# Altium PCB Mag_Encoder_TLE5501.PcbDoc
Units mil, origin at the board's own origin, x right, y up, seen from the top; angles counter-clockwise.
Board outline 1496.06 x 1105.24 mil, 2 copper layers (Top Layer, Bottom Layer); 5 components, 5 nets, 20 pads, 0 vias.
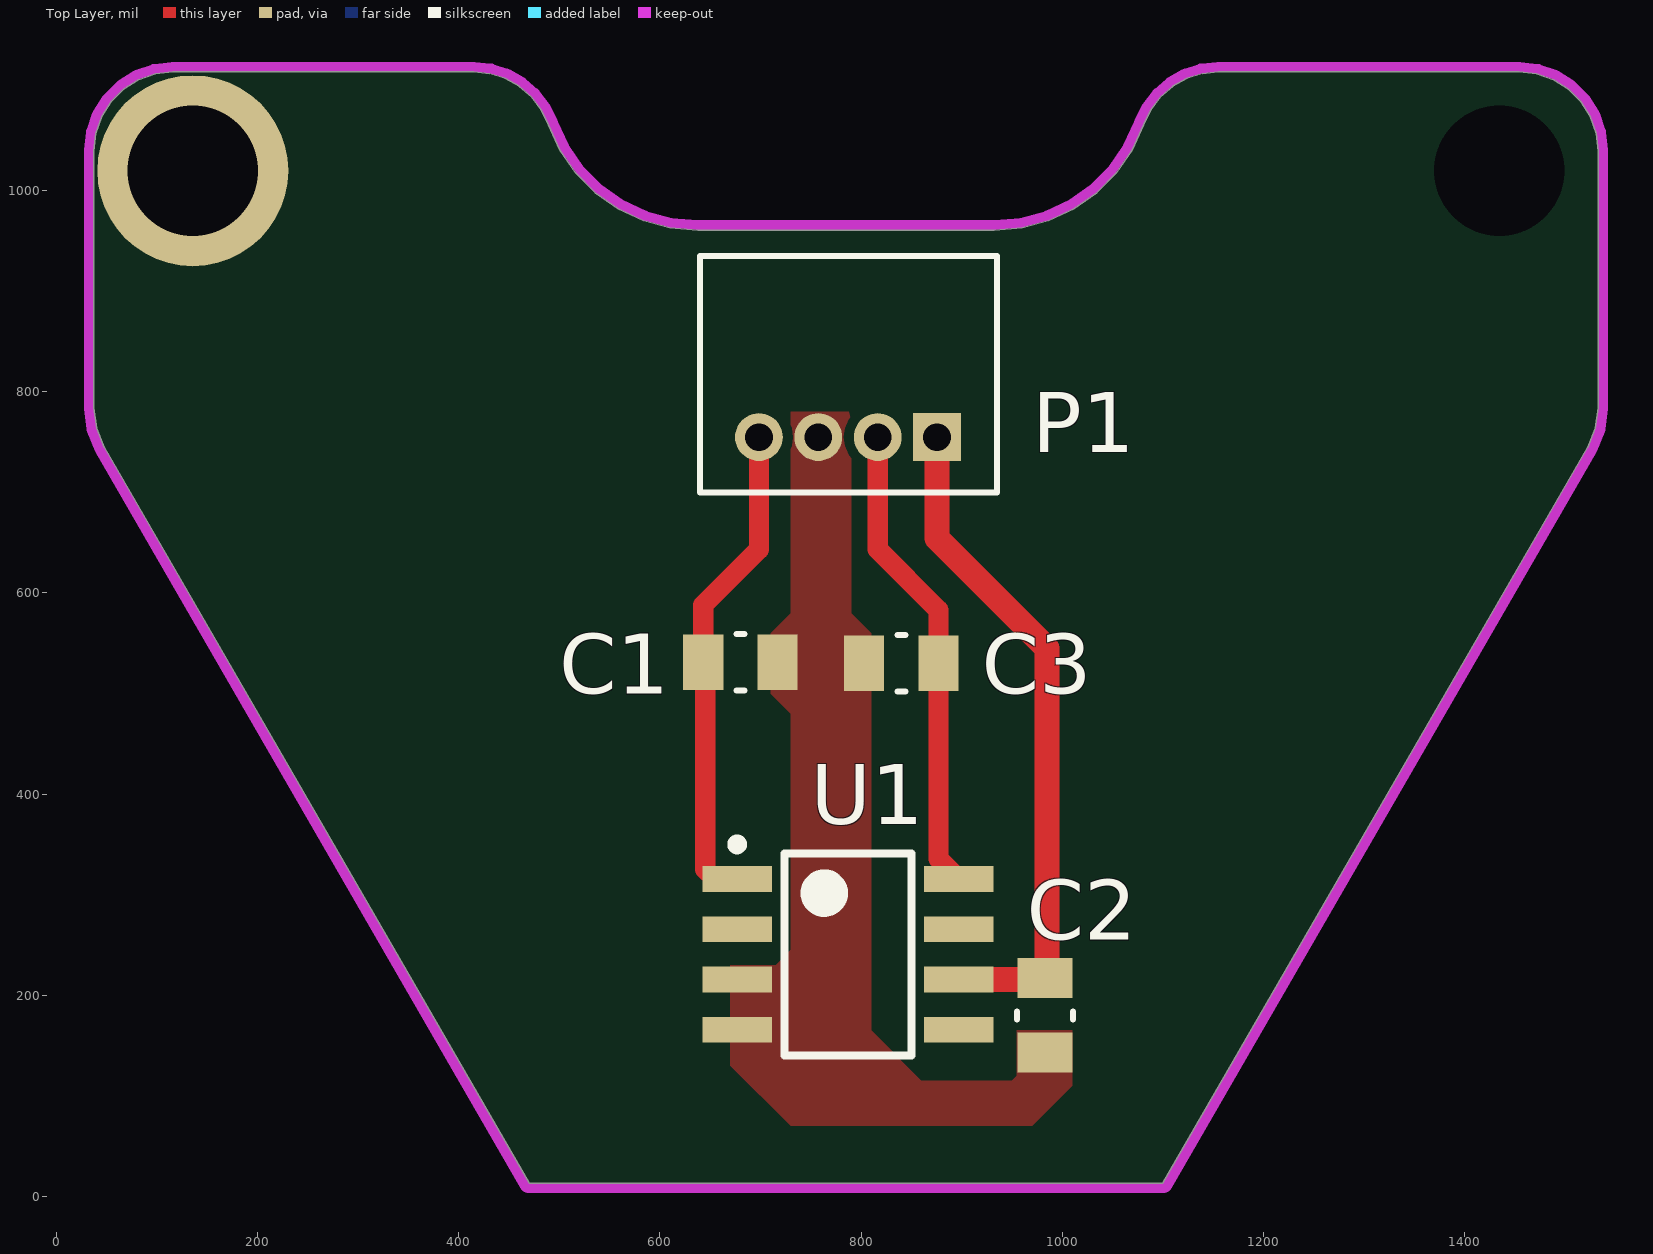
[diagram p0: Top Layer view]
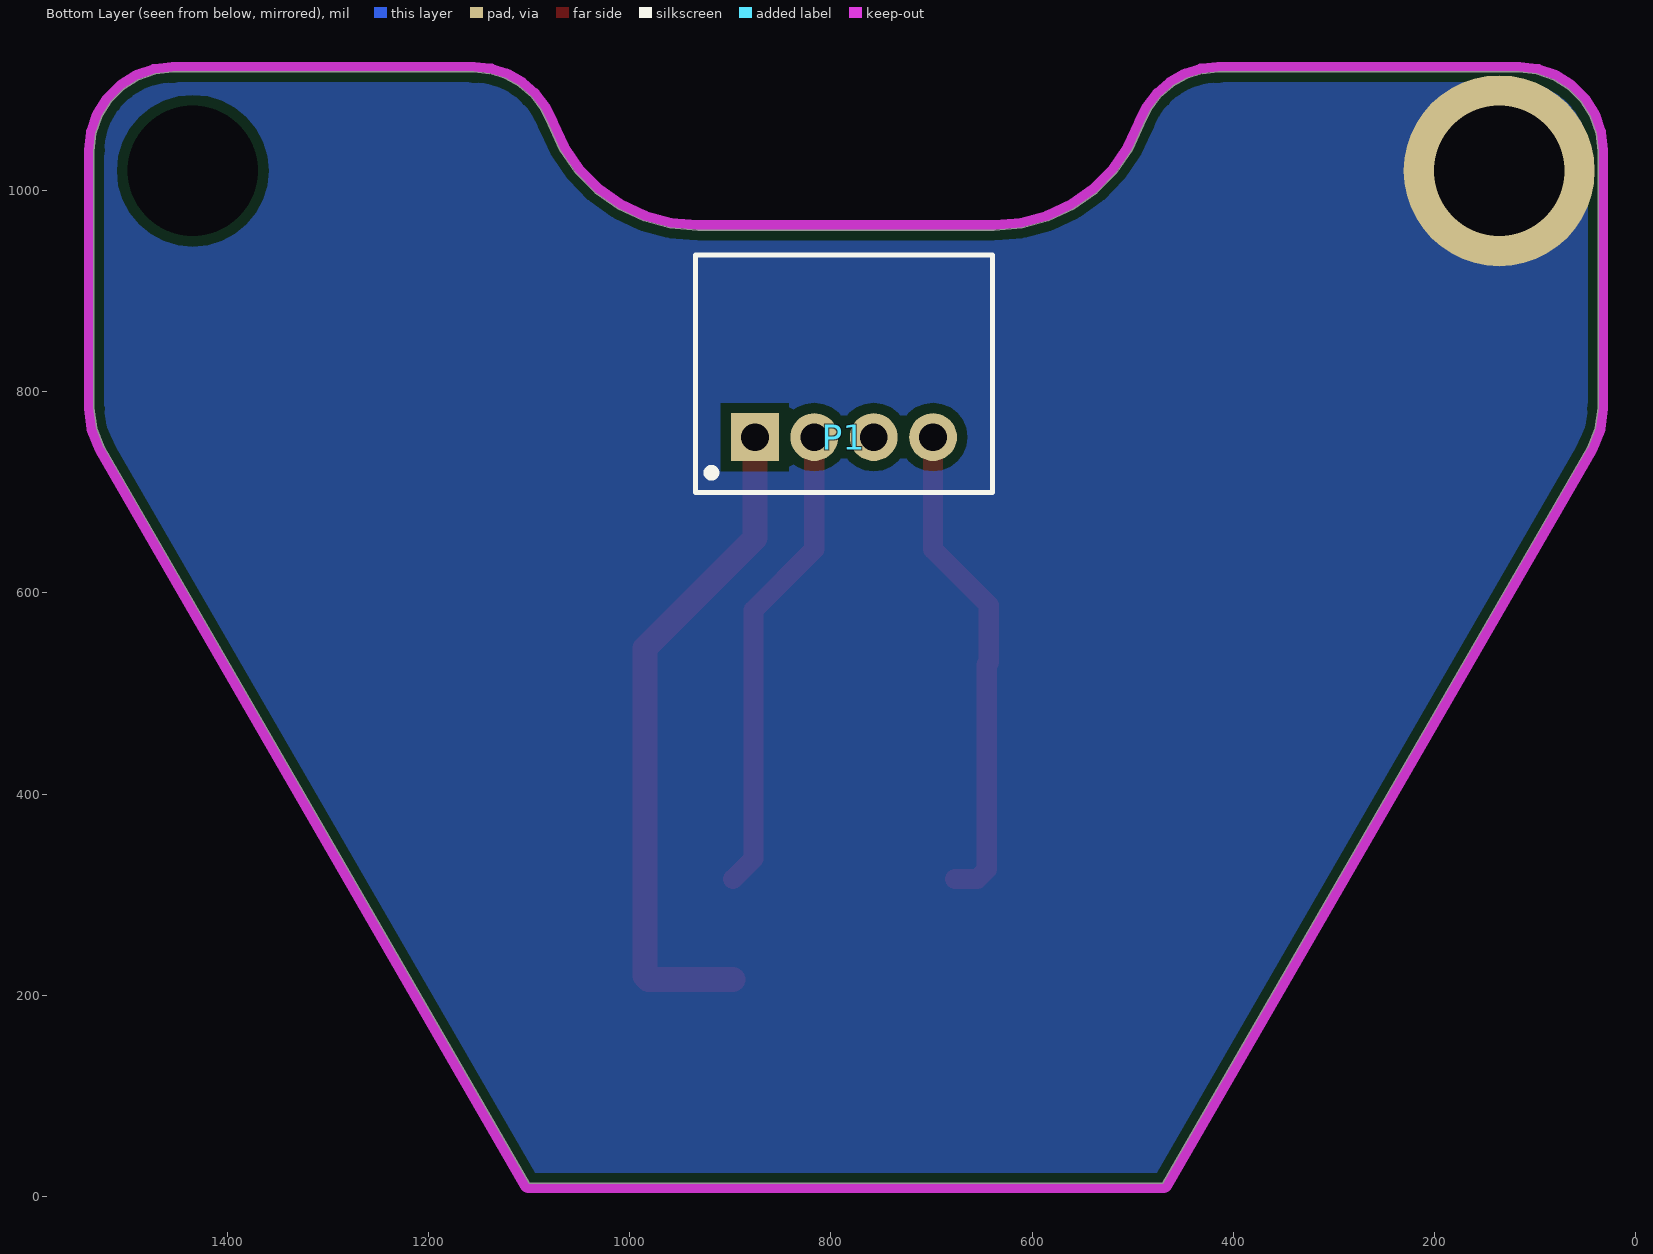
[diagram p1: Bottom Layer view, seen from below]

## Layer stack, top to bottom
Top Solder: solder mask 0.4, Solder Resist, Dk 3.5
Top Layer: signal copper 1.4
Dielectric 1: dielectric 12.6, FR-4, Dk 4.8
Bottom Layer: signal copper 1.4
Bottom Solder: solder mask 0.4, Solder Resist, Dk 3.5

## Board outline
1099.96,13.03 1522.48,744.86 1530.35,763.85 1533.03,784.23 1533.03,1039.54 1531.06,1057.06 1525.23,1073.7 1515.85,1088.63 1503.38,1101.1 1488.46,1110.48 1471.81,1116.3 1454.29,1118.28 1155.35,1118.28 1139.31,1116.62 1123.94,1111.74 1109.89,1103.83 1097.74,1093.22 1088.02,1080.36 1081.11,1065.78 1069.64,1040.62 1053.94,1017.85 1034.5,998.17 1011.92,982.21 986.89,970.43 960.19,963.22 932.64,960.8 637.36,960.8 609.81,963.22 583.11,970.43 558.08,982.21 535.5,998.17 516.06,1017.85 500.36,1040.62 488.89,1065.78 481.98,1080.36 472.26,1093.22 460.11,1103.83 446.06,1111.74 430.69,1116.62 414.65,1118.28 115.71,1118.28 98.19,1116.3 81.54,1110.48 66.61,1101.1 54.15,1088.63 44.77,1073.7 38.94,1057.06 36.97,1039.54 36.97,784.23 39.65,763.85 47.52,744.86 470.04,13.03

## Design rules (kind name [scope] priority, off if disabled: settings)
BoardOutlineClearance [All] p1: gap=0 except(10: Track-OutlineEdge)
Clearance [All] p1: gap=10
PolygonConnect [All] p1: connectstyle=Direct reliefconductorwidth=10 reliefentries=4 polygonreliefangle="90 Angle" airgapwidth=10
RoomDefinition Mag_Encoder_TLE5501 [InComponentClass('Mag_Encoder_TLE5501')] p1: confinementstyle=ConfineIn formatcopy=TRUE lockcomponents=FALSE outline -70,-115 1665,-115 1665,1180 -70,1180
RoutingVias [All] p1: holewidth=28 width=50 viastyle="Through Hole" minholewidth=28 minwidth=50 maxholewidth=28 maxwidth=50
SolderMaskExpansion [All] p1: expansion=4
Width [All] p1: maxlimit=50 minlimit=10 preferedwidth=10 minimp=50.000000 maximp=50.000000 favimp=50.000000
30 further rules are at their usual default settings.

## Components (designator, comment, footprint, x,y, rotation, side; value= is the part's Value field where it differs from the comment)
C1 "1000pF" 0805 680,531 r180 top
C2 "100nF" 0805 982.92,180 r90 top
C3 "1000pF" 0805 840,530 r0 top
P1 "S4B-ZR_(LF)(SN)" *JST_S4B-ZR(LF)(SN) 787,755 r180 bottom
U1 "TLE5501" "8-SOIC TLE5XXX ENC" 787,240.5 r0 top

## Footprints (in the part's own frame and the unit in brackets; to place one, negate y for a bottom-side part, rotate by r counter-clockwise, add the part's x,y. Pads: shape width x height; smd on the part's side, far side on the other; paste and mask are expansions set on the pad)
"8-SOIC TLE5XXX ENC" [mm]
  rect 1.75x0.65 smd: 1(-2.8,1.905) 2(-2.8,0.635) 3(-2.8,-0.635) 4(-2.8,-1.905) 5(2.8,-1.905) 6(2.8,-0.635) 7(2.8,0.635) 8(2.8,1.905)
  silkscreen extent -2.92,-2.55 1.6,2.9, body extent -2,-2.55 2,2.55, height 1.7
0805 [mil]
  rect 40x55 smd: 1(-37,0) 2(37,0)
  silkscreen extent -4,-28 4,28
*JST_S4B-ZR(LF)(SN) [mm]
  rect 1.208x1.208 hole 0.7: 1(-2.25,0)
  round 1.208 hole 0.7: 2(-0.75,0) 3(0.75,0) 4(2.25,0)
  silkscreen extent -3.75,-1.4 3.75,4.6, body extent -3.75,-1.43 3.75,4.57, height 3.7

## Part data
C1 C3: library part "CAP 1000pF 0805", "CAP CER 1000PF 50V X7R 0805"
C2: library part "CAP 100nF 0805", "CAP CER 0.1UF 50V X7R 0805"
P1: "Conn Shrouded Header HDR 4 POS 1.5mm Solder RA Thru-Hole Box"
U1: "TMR 360deg Magnetic Encoder"

## Free pads (board coordinates)
  round 190 hole 130: 1(135.39,1019.85)
  round 0 hole 130: 2(1434.61,1019.85)

## Nets (pads, with @x,y where several pads share a name; then routed paths per layer and width w, separated by ;. In a path a pad name is that pad's centre, name@x,y a point inside that pad or via, vN(x,y) a via of type N, cw(c..) or ccw(c..) an arc to the next point about the centre after c; other vN are vias at no path point)
GND: pad.1
SGND: C1.1 C2.1 C3.1 P1.3 U1.3 U1.4
VCC: C2.2 P1.1 U1.6 | length 670.5
  Top Layer w25: P1.1 875.58,654.42 985,545 985,219.08 C2.2 981.42,215.5 U1.6
VOUT_1: C3.2 P1.2 U1.8 | length 472.9
  Top Layer w20: P1.2 816.53,643.47 877,583 C3.2 877,335.74 U1.8
VOUT_2: C1.2 P1.4 U1.1 | length 489.5
  Top Layer w20: U1.1 654.5,315.5 645,325 645,529 C1.2 643,588 698.42,643.42 P1.4
pads on no net: U1.2 U1.5 U1.7

## Polygon pours and split planes (outlines as drawn)
SGND on Top Layer "SGND_L01_P000" (solid, pour order 0): 730,780 785,780 790,780 790,580 810,560 810,165 860,115 950,115 955,120 955,165 1010,165 1010,110 970,70 730,70 670,130 670,230 715,230 730,245 730,480 710,500 710,560 730,580
GND on Bottom Layer "GND_L02_P004" (solid, remove dead copper, pour order 4): 10,1125 15,1120 1580,1120 1580,10 1570,10 1565,5 45,5 0,55 0,60 0,1115 5,1120 15,1120

## Keep-outs
Keep-Out Layer:
  lines w10: 31.97,784.23 ccw(c36.97,784.23) 32.01,783.56 ; 31.97,784.23 ccw(c36.97,784.23) 32.01,783.58 32.01,783.56 ; 31.97,784.23 31.97,1039.54 ; 31.97,1039.54 cw(c36.97,1039.54) 32,1040.1 ; 31.97,1039.54 cw(c36.97,1039.54) 32,1040.1 ; 32.01,783.56 34.69,763.21 ; 32,1040.1 33.97,1057.62 ; 33.97,1057.62 cw(c38.94,1057.06) 34.22,1058.71 ; 33.97,1057.62 cw(c38.94,1057.06) 34.22,1058.71 ; 34.22,1058.71 40.05,1075.35 ; 34.69,763.2 ccw(c39.65,763.85) 35.04,761.92 ; 34.69,763.21 ccw(c39.65,763.85) 35.03,761.94 35.04,761.92 ; 34.69,763.21 34.69,763.2 ; 35.04,761.92 42.89,742.96 ; 40.05,1075.35 cw(c44.77,1073.7) 40.53,1076.36 ; 40.05,1075.35 cw(c44.77,1073.7) 40.53,1076.36 ; 40.53,1076.36 49.91,1091.29 ; 42.9,742.95 ccw(c47.52,744.86) 43.19,742.36 ; 42.89,742.96 ccw(c47.52,744.86) 43.19,742.36 ; 42.89,742.96 42.9,742.95 ; 43.19,742.36 465.71,10.53 ; 49.91,1091.29 cw(c54.15,1088.63) 50.61,1092.17 50.63,1092.18 ; 49.91,1091.29 cw(c54.15,1088.63) 50.63,1092.18 ; 50.63,1092.18 63.06,1104.62 ; 63.06,1104.62 cw(c66.61,1101.1) 63.95,1105.33 ; 63.06,1104.62 63.08,1104.63 cw(c66.61,1101.1) 63.95,1105.33 ; 63.95,1105.33 78.88,1114.71 ; 78.88,1114.71 cw(c81.54,1110.48) 79.89,1115.2 ; 78.88,1114.71 cw(c81.54,1110.48) 79.89,1115.2 ; 79.89,1115.2 96.54,1121.02 ; 96.54,1121.02 cw(c98.19,1116.3) 97.63,1121.27 ; 96.54,1121.02 cw(c98.19,1116.3) 97.63,1121.27 ; 97.63,1121.27 115.15,1123.24 ; 115.15,1123.24 cw(c115.71,1118.28) 115.71,1123.28 ; 115.15,1123.24 cw(c115.71,1118.28) 115.71,1123.28 ; 115.71,1123.28 414.65,1123.28 ; 414.65,1123.28 cw(c414.65,1118.28) 415.16,1123.25 ; 414.65,1123.28 cw(c414.65,1118.28) 415.17,1123.25 ; 415.16,1123.25 415.17,1123.25 ; 415.17,1123.25 431.19,1121.6 ; 431.19,1121.6 cw(c430.69,1116.62) 432.21,1121.39 ; 431.2,1121.6 cw(c430.69,1116.62) 432.21,1121.39 ; 431.19,1121.6 431.2,1121.6 ; 432.21,1121.39 447.58,1116.51 ; 447.58,1116.51 cw(c446.06,1111.74) 448.51,1116.1 ; 447.58,1116.51 cw(c446.06,1111.74) 448.51,1116.1 ; 448.52,1116.09 ccw(c446.06,1111.74) 448.51,1116.1 ; 448.51,1116.1 448.51,1116.1 ; 448.51,1116.1 448.52,1116.09 ; 448.52,1116.09 462.56,1108.19 ; 462.57,1108.18 cw(c460.11,1103.83) 463.4,1107.59 ; 462.57,1108.18 ccw(c460.11,1103.83) 462.56,1108.19 ; 462.57,1108.18 cw(c460.11,1103.83) 463.42,1107.58 ; 462.56,1108.19 462.57,1108.18 ; 462.57,1108.18 462.57,1108.18 ; 463.4,1107.59 463.42,1107.58 ; 463.42,1107.58 475.53,1097 ; 465.71,10.53 ccw(c470.04,13.03) 470.04,8.03 ; 465.71,10.53 ccw(c470.04,13.03) 470.04,8.03 ; 470.04,8.03 1099.96,8.03 ; 475.55,1096.98 cw(c472.26,1093.22) 476.24,1096.23 ; 475.53,1097 cw(c472.26,1093.22) 476.24,1096.23 ; 475.53,1097 475.55,1096.98 ; 476.24,1096.23 485.97,1083.37 ; 485.97,1083.37 cw(c481.98,1080.36) 486.5,1082.5 ; 485.97,1083.37 cw(c481.98,1080.36) 486.5,1082.5 ; 486.5,1082.5 493.41,1067.92 ; 493.41,1067.92 cw(c488.89,1065.78) 493.44,1067.86 ; 493.41,1067.92 cw(c488.89,1065.78) 493.44,1067.86 ; 493.44,1067.86 504.73,1043.09 519.93,1021.05 538.75,1002 560.61,986.54 584.84,975.15 610.69,968.17 637.58,965.8 932.42,965.8 959.31,968.17 985.16,975.15 1009.39,986.54 1031.25,1002 1050.07,1021.05 1065.27,1043.09 1076.56,1067.86 ; 1076.56,1067.86 cw(c1081.11,1065.78) 1076.59,1067.92 1076.6,1067.94 ; 1076.56,1067.86 cw(c1081.11,1065.78) 1076.6,1067.94 ; 1076.6,1067.94 1083.49,1082.48 ; 1083.49,1082.48 cw(c1088.02,1080.36) 1084.03,1083.37 1084.03,1083.38 ; 1083.5,1082.5 cw(c1088.02,1080.36) 1084.03,1083.38 ; 1083.49,1082.48 1083.5,1082.5 ; 1084.03,1083.38 1093.75,1096.22 ; 1093.75,1096.22 cw(c1097.74,1093.22) 1094.45,1096.98 ; 1093.75,1096.22 1093.76,1096.23 cw(c1097.74,1093.22) 1094.47,1097 ; 1094.45,1096.98 1094.47,1097 ; 1094.47,1097 1106.58,1107.58 ; 1099.96,8.03 ccw(c1099.96,13.03) 1104.29,10.53 ; 1099.96,8.03 ccw(c1099.96,13.03) 1104.29,10.53 ; 1104.29,10.53 1526.81,742.36 ; 1106.58,1107.58 cw(c1109.89,1103.83) 1107.43,1108.18 ; 1106.6,1107.59 cw(c1109.89,1103.83) 1107.43,1108.18 ; 1106.58,1107.58 1106.6,1107.59 ; 1107.44,1108.19 ccw(c1109.89,1103.83) 1107.43,1108.18 ; 1107.43,1108.18 1107.43,1108.18 ; 1107.43,1108.18 1107.44,1108.19 ; 1107.44,1108.19 1121.48,1116.09 ; 1121.49,1116.1 cw(c1123.94,1111.74) 1122.42,1116.51 ; 1121.49,1116.1 ccw(c1123.94,1111.74) 1121.48,1116.09 ; 1121.48,1116.1 cw(c1123.94,1111.74) 1122.42,1116.51 ; 1121.48,1116.09 1121.48,1116.1 ; 1121.48,1116.1 1121.49,1116.1 ; 1122.42,1116.51 1137.79,1121.39 ; 1137.79,1121.39 cw(c1139.31,1116.62) 1138.8,1121.6 ; 1137.79,1121.39 cw(c1139.31,1116.62) 1138.81,1121.6 ; 1138.8,1121.6 1138.81,1121.6 ; 1138.81,1121.6 1154.83,1123.25 ; 1154.84,1123.25 cw(c1155.35,1118.28) 1155.35,1123.28 ; 1154.83,1123.25 cw(c1155.35,1118.28) 1155.35,1123.28 ; 1154.83,1123.25 1154.84,1123.25 ; 1155.35,1123.28 1454.29,1123.28 ; 1454.29,1123.28 cw(c1454.29,1118.28) 1454.85,1123.24 ; 1454.29,1123.28 cw(c1454.29,1118.28) 1454.85,1123.24 ; 1454.85,1123.24 1472.37,1121.27 ; 1472.37,1121.27 cw(c1471.81,1116.3) 1473.46,1121.02 ; 1472.37,1121.27 cw(c1471.81,1116.3) 1473.46,1121.02 ; 1473.46,1121.02 1490.11,1115.2 ; 1490.11,1115.2 cw(c1488.46,1110.48) 1491.12,1114.71 ; 1490.11,1115.2 cw(c1488.46,1110.48) 1491.12,1114.71 ; 1491.12,1114.71 1506.05,1105.33 ; 1506.05,1105.33 cw(c1503.38,1101.1) 1506.92,1104.63 1506.94,1104.62 ; 1506.05,1105.33 cw(c1503.38,1101.1) 1506.94,1104.62 ; 1506.94,1104.62 1519.37,1092.18 ; 1519.37,1092.18 cw(c1515.85,1088.63) 1520.09,1091.29 ; 1519.37,1092.18 1519.39,1092.16 cw(c1515.85,1088.63) 1520.09,1091.29 ; 1520.09,1091.29 1529.47,1076.36 ; 1526.81,742.36 ccw(c1522.48,744.86) 1527.1,742.95 ; 1526.81,742.36 ccw(c1522.48,744.86) 1527.11,742.96 ; 1527.1,742.95 1527.11,742.96 ; 1527.11,742.96 1534.96,761.92 ; 1529.47,1076.36 cw(c1525.23,1073.7) 1529.95,1075.35 ; 1529.47,1076.36 cw(c1525.23,1073.7) 1529.95,1075.35 ; 1529.95,1075.35 1535.78,1058.71 ; 1534.96,761.92 ccw(c1530.35,763.85) 1535.31,763.2 ; 1534.96,761.92 1534.97,761.94 ccw(c1530.35,763.85) 1535.31,763.21 ; 1535.31,763.2 1535.31,763.21 ; 1535.31,763.21 1537.99,783.56 ; 1535.78,1058.71 cw(c1531.06,1057.06) 1536.03,1057.62 ; 1535.78,1058.71 cw(c1531.06,1057.06) 1536.03,1057.62 ; 1536.03,1057.62 1538,1040.1 ; 1537.99,783.56 ccw(c1533.03,784.23) 1538.03,784.23 ; 1537.99,783.56 1537.99,783.58 ccw(c1533.03,784.23) 1538.03,784.23 ; 1538,1040.1 cw(c1533.03,1039.54) 1538.03,1039.54 ; 1538,1040.1 cw(c1533.03,1039.54) 1538.03,1039.54 ; 1538.03,784.23 1538.03,1039.54

## Silkscreen, mask and mechanical layers (free items; w line width, h text height)
Top Overlay:
  lines w6: 640,700 640,935 935,935 935,700 640,700
Mechanical 16:
  drawing of 164 lines, arcs and shapes, not listed